# Altium PCB PCB.PcbDoc
Units mm, origin at the board's own origin, x right, y up, seen from the top; angles counter-clockwise.
Board outline 160 x 38 mm, 2 copper layers (L1, L4), stack 1.57 mm thick; 18 components, 38 nets, 92 pads, 0 vias.
Unrouted connection lines stored in the file: 39.
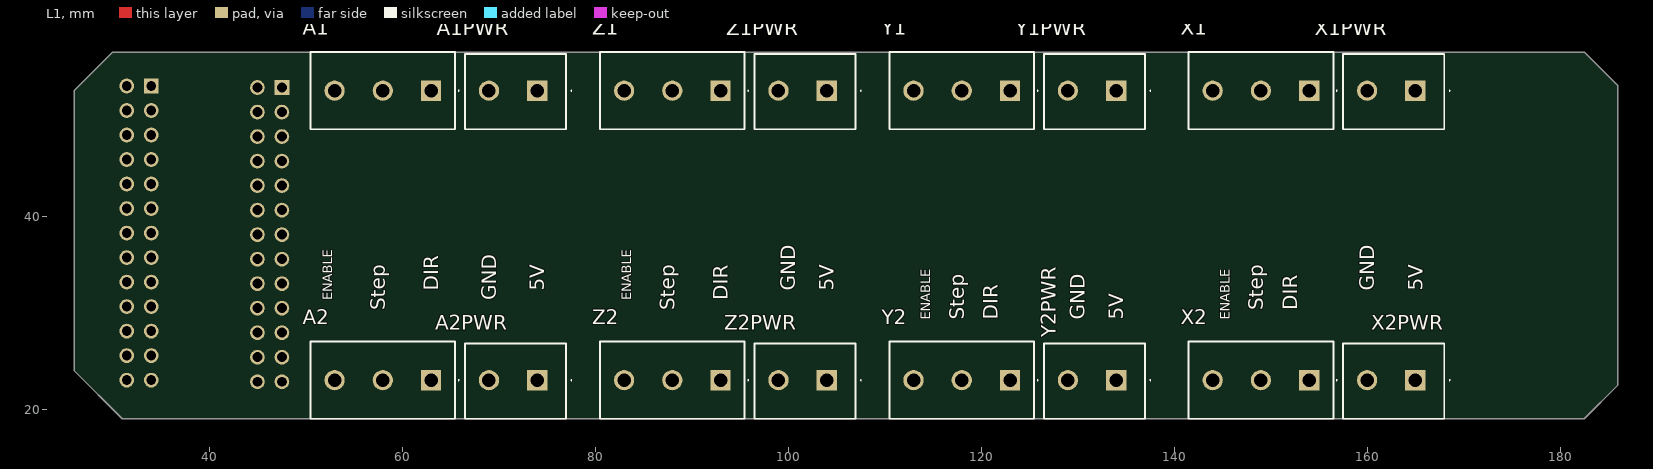
[diagram p0: L1 view]
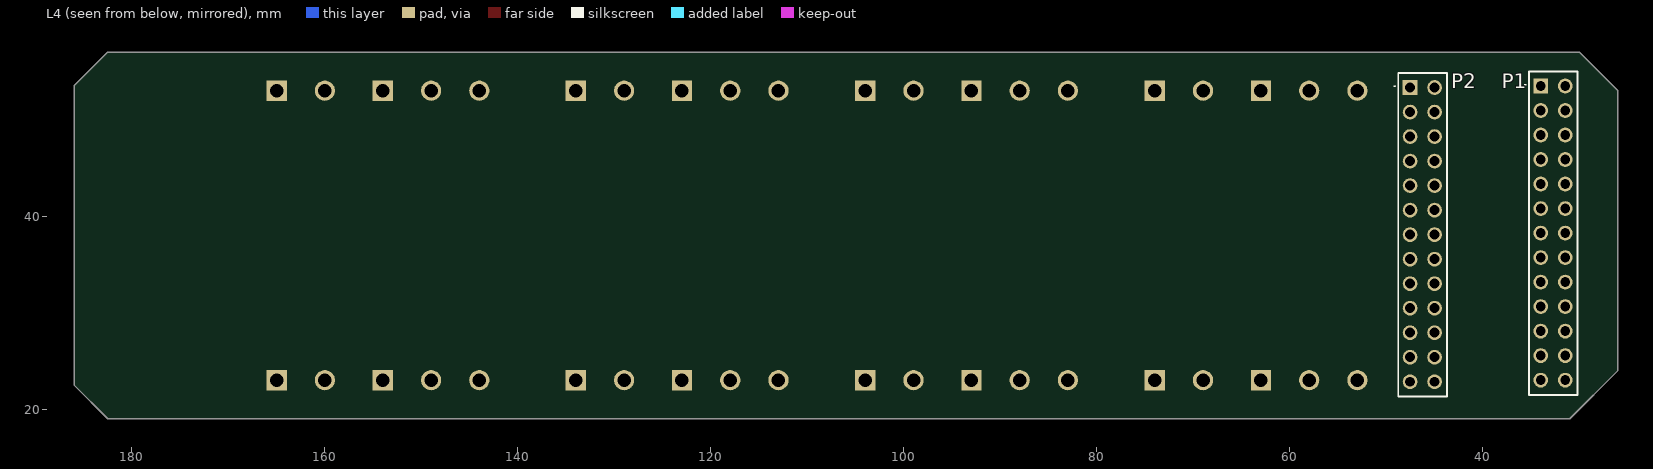
[diagram p1: L4 view, seen from below]

## Layer stack, top to bottom
Top Solder: solder mask 0.01, Solder Resist, Dk 3.5
L1: signal copper 0.035
Dielectric 1: dielectric 1.5, FR-4, Dk 4.8
L4: signal copper 0.035
Bottom Solder: solder mask 0.01, Solder Resist, Dk 3.5

## Board outline
31,19 26,24 26,53 30,57 182.5,57 186,53.5 186,22.5 182.5,19

## Design rules (kind name [scope] priority, off if disabled: settings)
BoardOutlineClearance [All] p1: gap=0.22 ignorepadtopadclearanceinfootprint=FALSE
Clearance [All] p1: gap=0.127 ignorepadtopadclearanceinfootprint=FALSE
ComponentClearance [All] p1: gap=0.254 collisioncheckmode=3 verticalgap=2540 showdistances=FALSE
FanoutControl Fanout_SOIC [IsSOIC] p3: bgadir=Out bgaviamode=Closest fanoutstyle=Auto fanoutdirection=Alternating viagrid=0.025 // Fanout_SOIC (Default Rule)
FanoutControl Fanout_Small [(CompPinCount < 5)] p4: bgadir=Out bgaviamode=Closest fanoutstyle=Auto fanoutdirection=OutThenIn viagrid=0.025 // Fanout_Small (Default Rule)
FanoutControl Fanout_Default [All] p5: bgadir=In bgaviamode=Closest fanoutstyle=Auto fanoutdirection=Alternating viagrid=0.025 // Fanout_Default (Default Rule)
HoleSize [All] p1: absolutevalues=TRUE maxlimit=4.5 minlimit=0.25 maxpercent=80.000 minpercent=20.000
HoleToHoleClearance [All] p1: gap=0.3 allowstackedmicrovias=TRUE
MinimumSolderMaskSliver [All] p1: minsoldermaskwidth=0.1
PlaneClearance [All] p1: clearance=0.2
PlaneConnect [All] p1: planeconnectstyle=Direct reliefexpansion=0.5 reliefentries=4 reliefconductorwidth=0.2 reliefairgap=0.25
PolygonConnect PolygonConnect_1 [InNet('GND')] p1: connectstyle=Direct reliefconductorwidth=0.254 reliefentries=4 polygonreliefangle="90 Angle" airgapwidth=0.254
PolygonConnect [All] p2: connectstyle=Direct reliefconductorwidth=0.3 reliefentries=4 polygonreliefangle="90 Angle" airgapwidth=0.16
RoutingCorners [All] p1: cornerstyle=45-Degree minsetback=2.5 maxsetback=2.5
RoutingPriority [All] p1 off: routingpriority=0
RoutingVias [All] p1: holewidth=0.25 width=0.504 viastyle="Through Hole" minholewidth=0.25 minwidth=0.504 maxholewidth=0.8 maxwidth=1.2
SilkToSilkClearance [All] p1: silktosilkclearance=0
SilkToSolderMaskClearance [IsPad] p1: minsilkscreentomaskgap=0 clearancetoexposedcopper=TRUE
SolderMaskExpansion [All] p1: expansion=0.05 istentingtop=FALSE
Width [All] p1: maxlimit=2 minlimit=0.127 preferedwidth=0.127
17 further rules are at their usual default settings.

## Components (designator, comment, footprint, x,y, rotation, side; value= is the part's Value field where it differs from the comment)
A1 "DG126-5.0-03P-14" DG1265003P1400AH 63,53 r180 top
A1PWR "DG126-5.0-02P-14" DG1265002P1400AH 74,53 r180 top
A2 "DG126-5.0-03P-14" DG1265003P1400AH 63,23 r180 top
A2PWR "DG126-5.0-02P-14" DG1265002P1400AH 74,23 r180 top
P1 "DS1023-2X13S21" DS10232X13S21 34,53.48 r270 bottom
P2 "DS1023-2X13S21" DS10232X13S21 47.54,53.32 r270 bottom
X1 "DG126-5.0-03P-14" DG1265003P1400AH 154,53 r180 top
X1PWR "DG126-5.0-02P-14" DG1265002P1400AH 165,53 r180 top
X2 "DG126-5.0-03P-14" DG1265003P1400AH 154,23 r180 top
X2PWR "DG126-5.0-02P-14" DG1265002P1400AH 165,23 r180 top
Y1 "DG126-5.0-03P-14" DG1265003P1400AH 123,53 r180 top
Y1PWR "DG126-5.0-02P-14" DG1265002P1400AH 134,53 r180 top
Y2 "DG126-5.0-03P-14" DG1265003P1400AH 123,23 r180 top
Y2PWR "DG126-5.0-02P-14" DG1265002P1400AH 134,23 r180 top
Z1 "DG126-5.0-03P-14" DG1265003P1400AH 93,53 r180 top
Z1PWR "DG126-5.0-02P-14" DG1265002P1400AH 104,53 r180 top
Z2 "DG126-5.0-03P-14" DG1265003P1400AH 93,23 r180 top
Z2PWR "DG126-5.0-02P-14" DG1265002P1400AH 104,23 r180 top

## Footprints (in the part's own frame and the unit in brackets; to place one, negate y for a bottom-side part, rotate by r counter-clockwise, add the part's x,y. Pads: shape width x height; smd on the part's side, far side on the other; paste and mask are expansions set on the pad)
DG1265002P1400AH [mm]
  rect 2.1x2.1 hole 1.4: 1(0,0)
  round 2.1 hole 1.4: 2(5,0)
  silkscreen extent -3.6,-3.8 7.5,4, body extent -3,-3.8 7.5,4, height 10.5
DG1265003P1400AH [mm]
  rect 2.1x2.1 hole 1.4: 1(0,0)
  round 2.1 hole 1.4: 2(5,0) 3(10,0)
  silkscreen extent -2.9,-4 12.5,4, body extent -2.5,-4 12.5,4, height 11
DS10232X13S21 [mm]
  rect 1.53x1.53 hole 1.02: 1(0,0)
  round 1.53 hole 1.02: 2(0,2.54) 3(2.54,0) 4(2.54,2.54) 5(5.08,0) 6(5.08,2.54) 7(7.62,0) 8(7.62,2.54) 9(10.16,0) 10(10.16,2.54) 11(12.7,0) 12(12.7,2.54) 13(15.24,0) 14(15.24,2.54) 15(17.78,0) 16(17.78,2.54) 17(20.32,0) 18(20.32,2.54) 19(22.86,0) 20(22.86,2.54) 21(25.4,0) 22(25.4,2.54) 23(27.94,0) 24(27.94,2.54) 25(30.48,0) 26(30.48,2.54)
  silkscreen extent -1.52,-1.65 32,3.81, body extent -1.52,-1.23 32,3.77, height 8.98

## Part data
A1 A2 X1 X2 Y1 Y2 Z1 Z2: library part DG126-5.0-03P-14-00AH, "Connector", Manufacturer_Name=Degson, ChipDip_Link=https://www.chipdip.ru/product/dg126-5.0-03p-14, Height=10.9mm, HelpURL=https://static.chipdip.ru/lib/309/DOC000309400.pdf, Manufacturer_Part_Number=DG126-5.0-03P-14
A1PWR A2PWR X1PWR X2PWR Y1PWR Y2PWR Z1PWR Z2PWR: library part DG126-5.0-02P-14-00AH, "Connector", Manufacturer_Name=Degson, ChipDip_Link=https://www.chipdip.ru/product/dg126-5.0-02p-14, Datasheet Link=https://asset.conrad.com/media10/add/160267/c1/-/en/001327203DS01/datasheet-1327203-degson-dg126-50-02p-14-00ah-1-screw-terminal-2-mm-number-of-pins-2-green-1-pcs.pdf, Height=10.4mm, HelpURL=https://static.chipdip.ru/lib/309/DOC000309400.pdf, Manufacturer_Part_Number=DG126-5.0-02P-14
P1 P2: "Connector", Manufacturer_Name="CONNFLY Elec", ChipDip_Link=https://www.chipdip.ru/product/pbd-26, Datasheet Link=http://www.connfly.com/static/upload/file/pdf/DS1023.pdf, Height=8.88mm, HelpURL=https://static.chipdip.ru/lib/095/DOC006095303.pdf, Manufacturer_Part_Number=DS1023-2X13S21

## Nets (pads, with @x,y where several pads share a name; then routed paths per layer and width w, separated by ;. In a path a pad name is that pad's centre, name@x,y a point inside that pad or via, vN(x,y) a via of type N, cw(c..) or ccw(c..) an arc to the next point about the centre after c; other vN are vias at no path point)
5V: A1PWR.1 A2PWR.1 X1PWR.1 X2PWR.1 Y1PWR.1 Y2PWR.1 Z1PWR.1 Z2PWR.1
"DIR A": A2.1 P2.18
"DIR X": P2.6 X2.1
"DIR Y": P2.10 Y2.1
"DIR Z": P2.14 Z2.1
E-stop: P2.3
ENABLE: A2.3 P2.2 X2.3 Y2.3 Z2.3
GND: A1PWR.2 A2PWR.2 P1.9 P1.11 P1.13 P1.15 P2.9 P2.11 P2.13 P2.15 X1PWR.2 X2PWR.2 Y1PWR.2 Y2PWR.2 Z1PWR.2 Z2PWR.2
"Home A": P2.26
"Home X": P2.20
"Home Y": P2.22
"Home Z": P2.24
IO17: A1.3 P1.2 X1.3 Y1.3 Z1.3
IO18: P1.1
IO19: P1.4 X1.2
IO20: P1.3
IO21: P1.6 X1.1
IO22: P1.5
IO23: P1.8 Y1.2
IO24: P1.7
IO25: P1.10 Y1.1
IO26: P1.12 Z1.2
IO27: P1.14 Z1.1
IO28: A1.2 P1.16
IO29: A1.1 P1.18
IO30: P1.20
IO31: P1.22
IO32: P1.24
IO33: P1.26
NetP1_17: P1.17 P1.19 P1.21 P1.23 P1.25
NetP2_17: P2.17 P2.19 P2.21 P2.23 P2.25
"OUTPUT 1": P2.7
"OUTPUT 2": P2.5
PWM: P2.1
"STEP A": A2.2 P2.16
"STEP X": P2.4 X2.2
"STEP Y": P2.8 Y2.2
"STEP Z": P2.12 Z2.2

## Polygon pours and split planes (outlines as drawn)
GND on L1 "NONET_L01_P001" (solid, shelved, pour order 1): 13,79 15,77 15,-4 194,-4 194,87

## Silkscreen, mask and mechanical layers (free items; w line width, h text height)
Top Overlay:
  text "DIR" at 63.746,32.254 h1.52 r90
  text "5V" at 74.746,32.254 h1.52 r90
  text "GND" at 100.746,32.254 h1.52 r90
  text "5V" at 104.746,32.254 h1.52 r90
  text "GND" at 160.746,32.254 h1.52 r90
  text "5V" at 165.746,32.254 h1.52 r90
  text "ENABLE" at 52.746,31.254 h1 r90
  text "GND" at 69.746,31.254 h1.52 r90
  text "ENABLE" at 83.746,31.254 h1 r90
  text "DIR" at 93.746,31.254 h1.52 r90
  text "Step" at 58.238,30.254 h1.52 r90
  text "Step" at 88.238,30.254 h1.52 r90
  text "Step" at 149.238,30.254 h1.52 r90
  text "DIR" at 152.746,30.254 h1.52 r90
  text "ENABLE" at 114.746,29.254 h1 r90
  text "Step" at 118.238,29.254 h1.52 r90
  text "DIR" at 121.746,29.254 h1.52 r90
  text "GND" at 130.746,29.254 h1.52 r90
  text "5V" at 134.746,29.254 h1.52 r90
  text "ENABLE" at 145.746,29.254 h1 r90
Mechanical 2:
  lines w0.254: 31,19 26,24 26,53 30,57 55,57 182.5,57 186,53.5 186,22.5 182.5,19 31,19 ; 31,19 31,19